# Altium PCB n-MAX.PcbDoc
Units mm, origin at the board's own origin, x right, y up, seen from the top; angles counter-clockwise.
Board outline 33.02 x 43.18 mm, 4 copper layers (Top Layer, 3.3V_PLANE, GND_PLANE, Bottom Layer); 26 components, 85 nets, 202 pads, 166 vias.
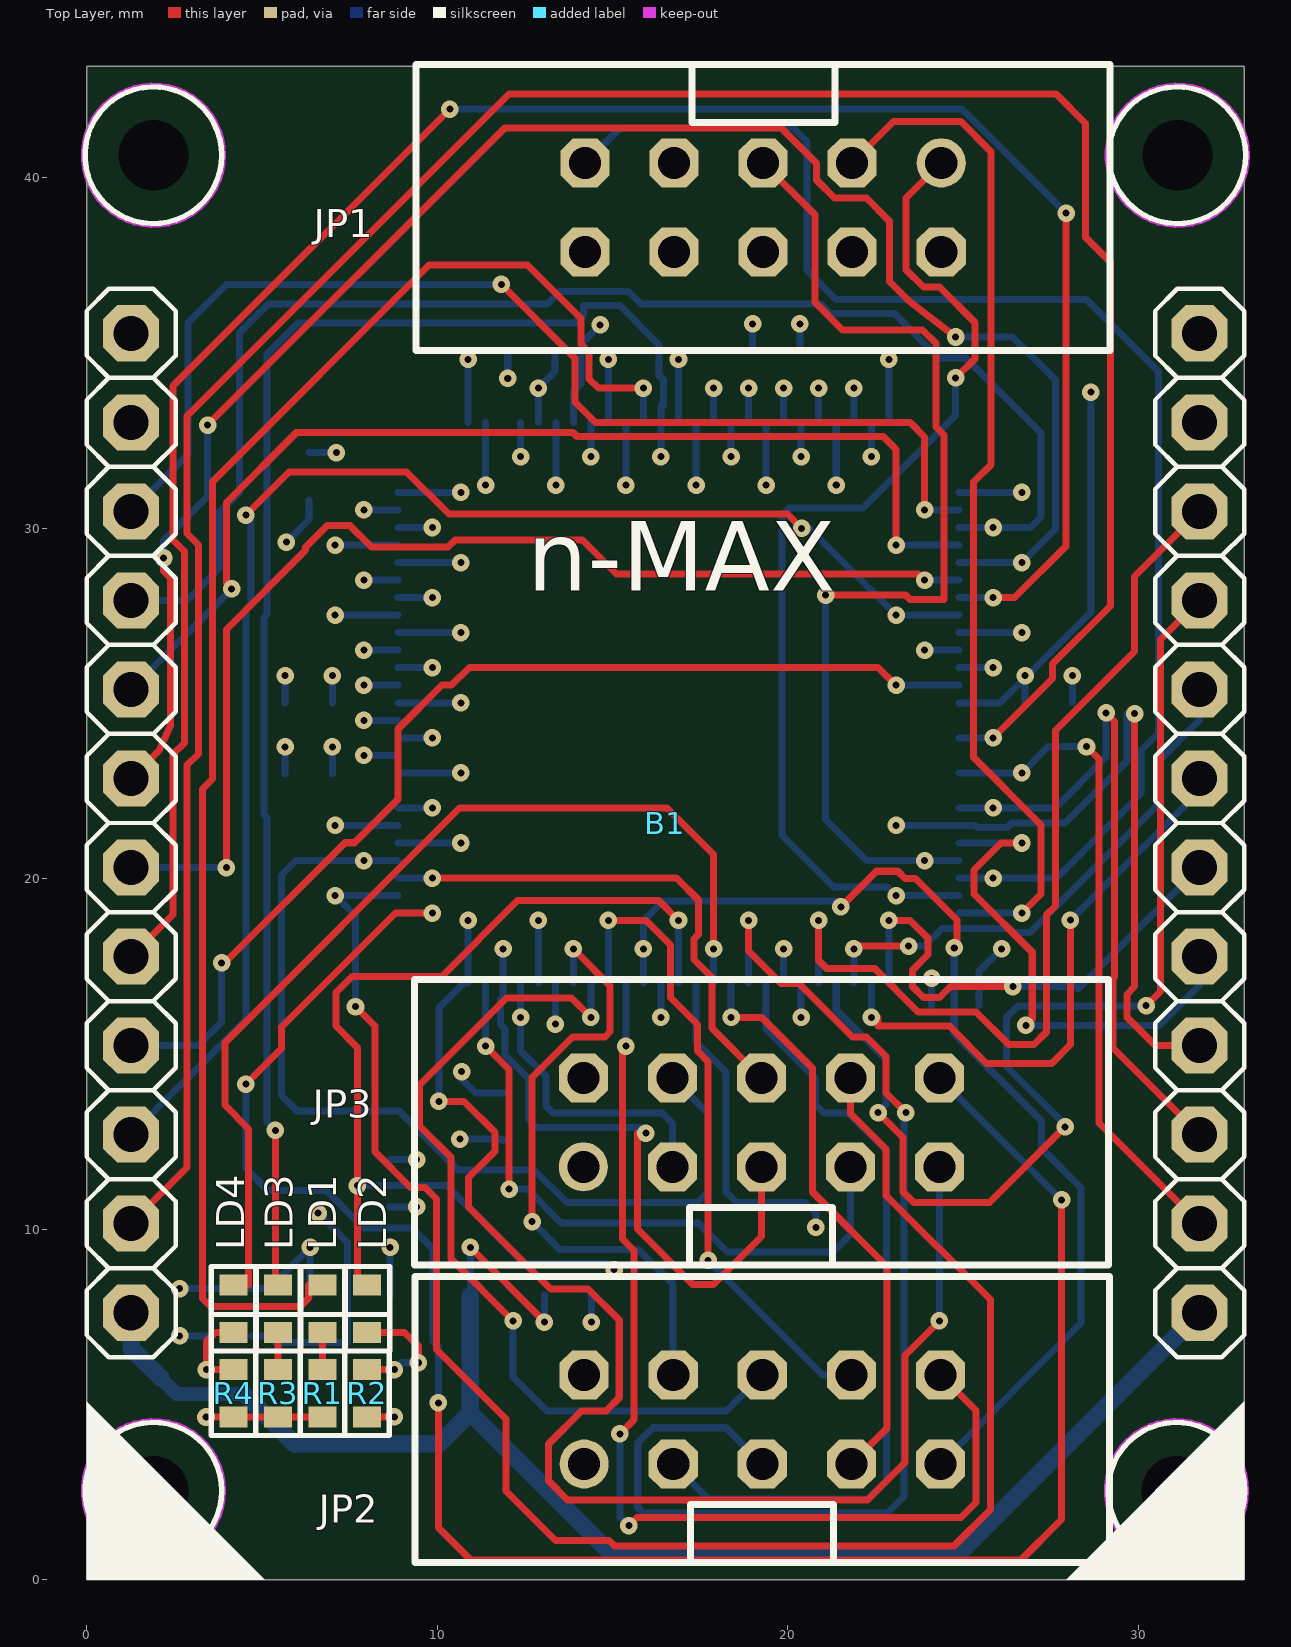
[diagram p0: Top Layer view]
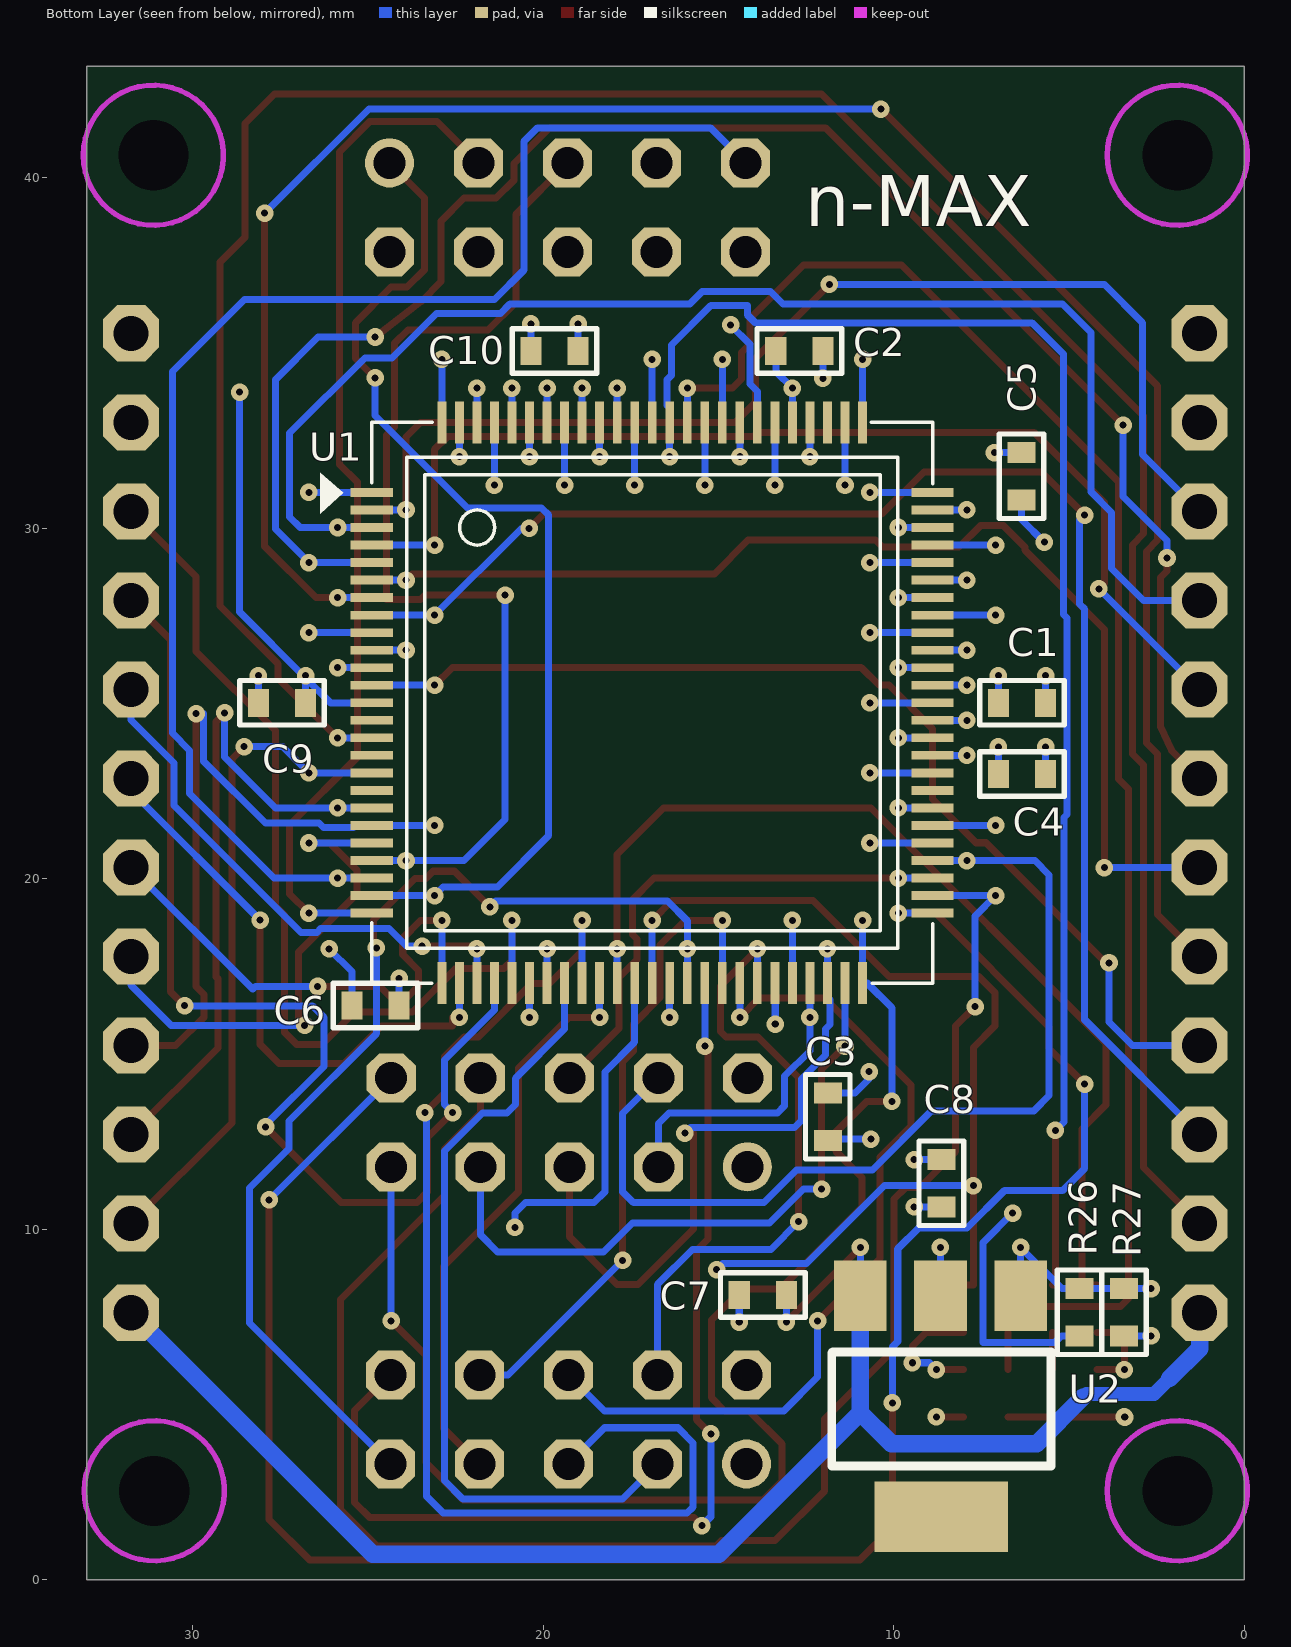
[diagram p1: Bottom Layer view, seen from below]
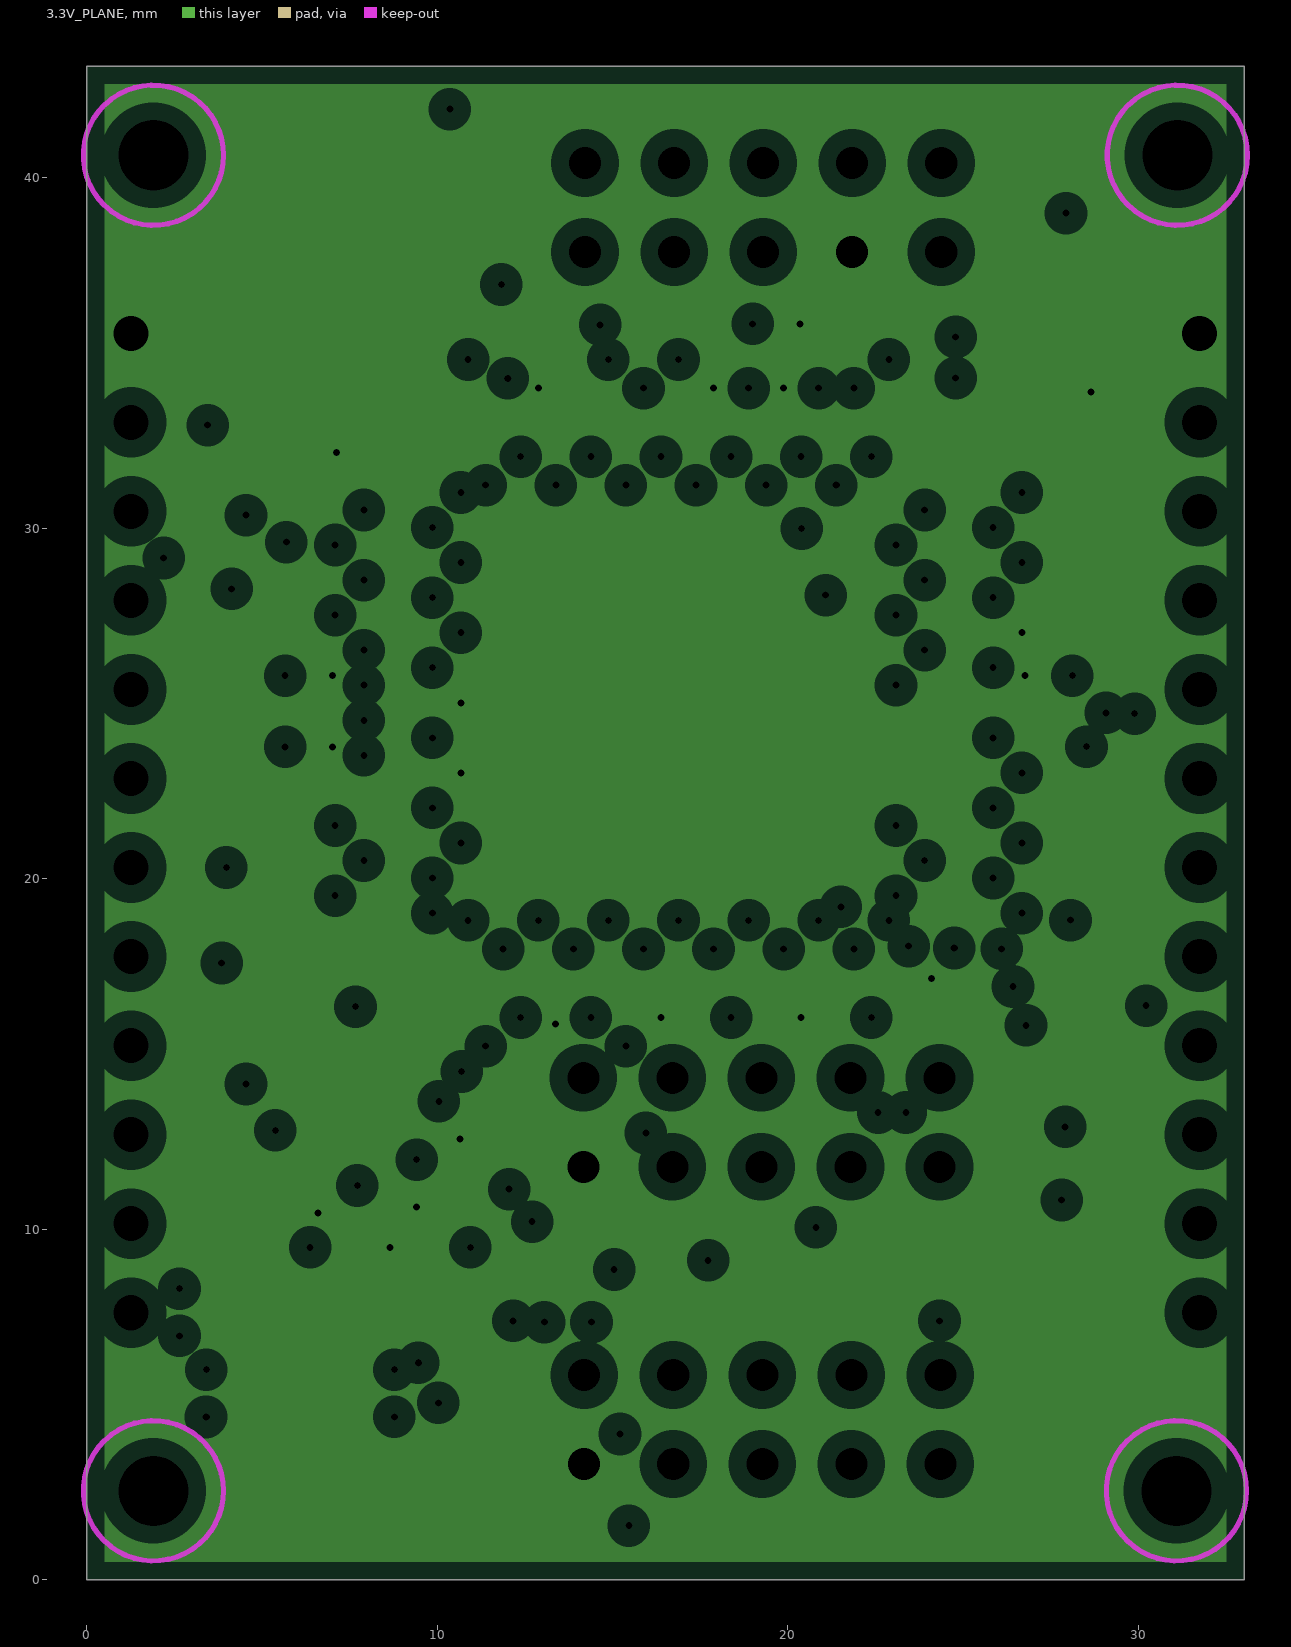
[diagram p2: 3.3V_PLANE, clearances drawn from the general rule]
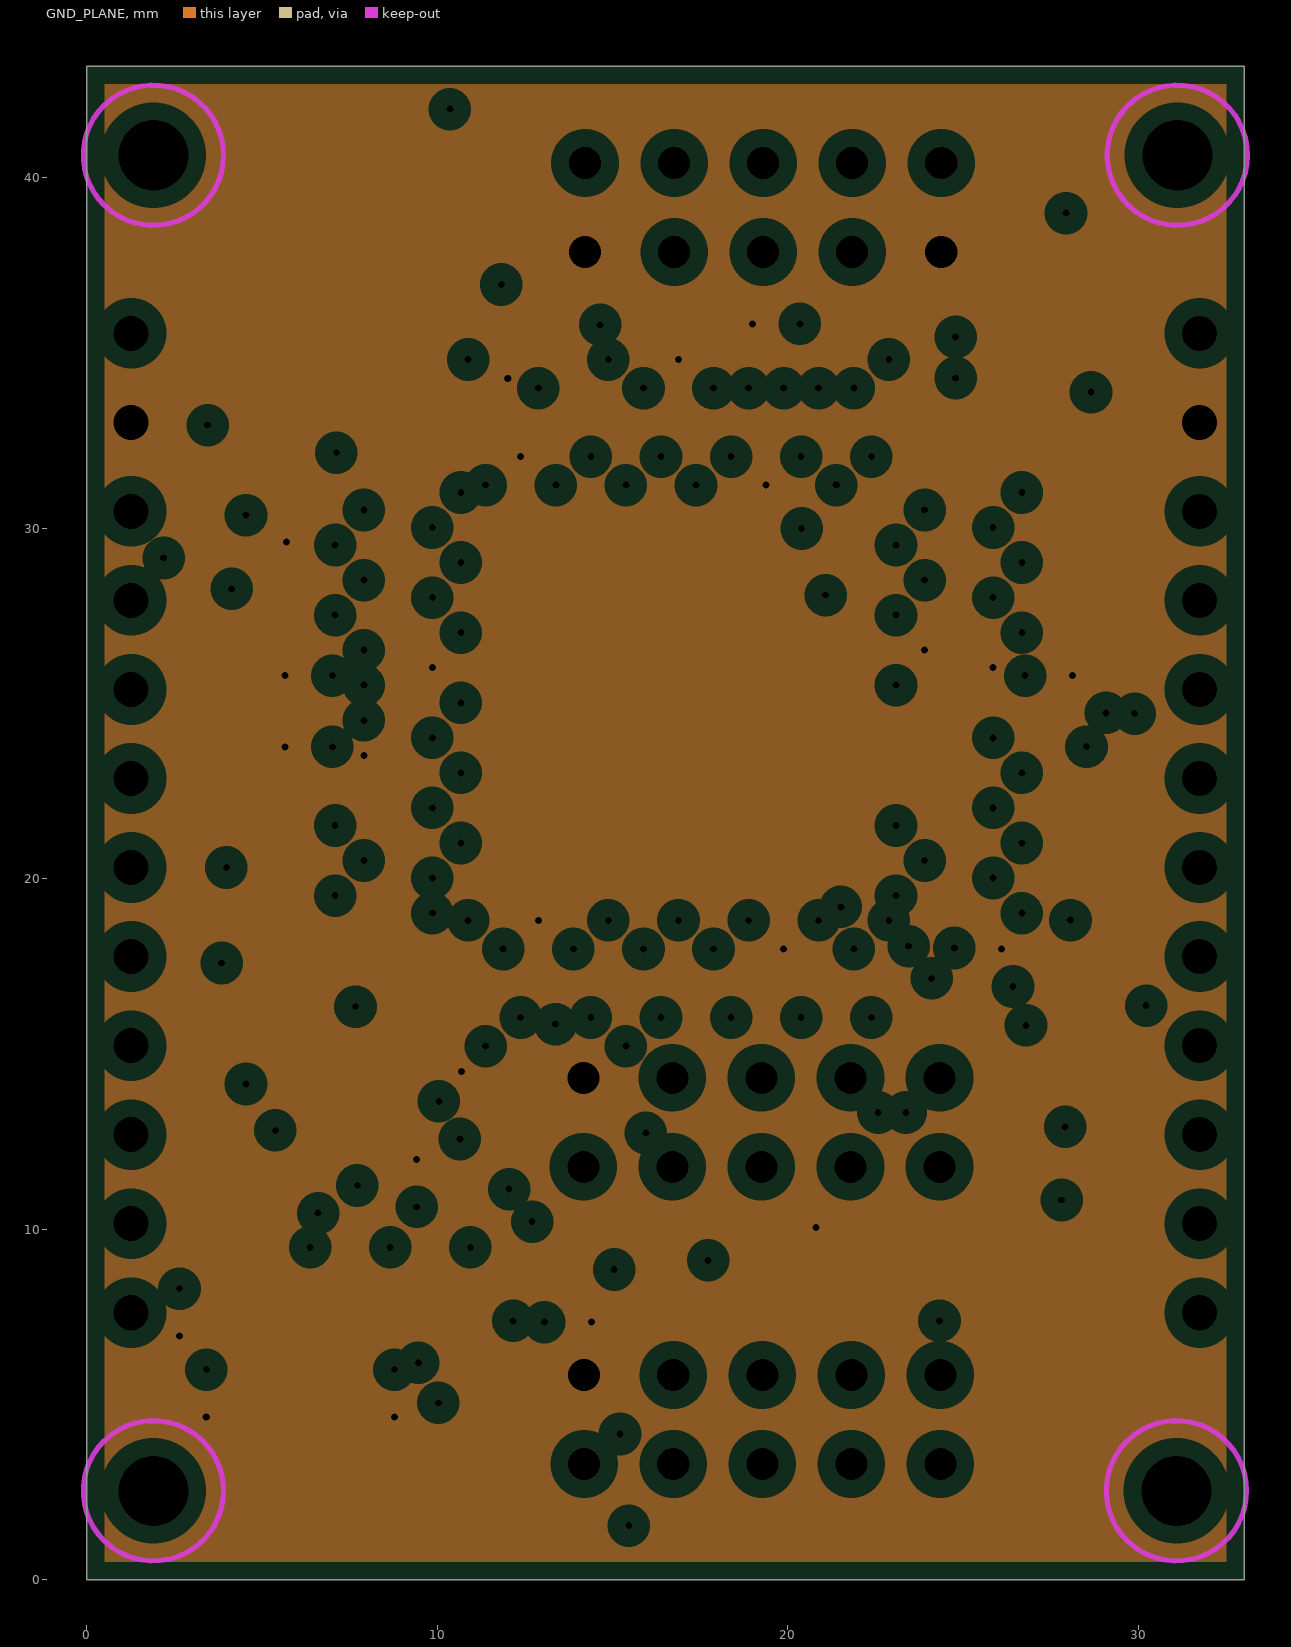
[diagram p3: GND_PLANE, clearances drawn from the general rule]

## Layer stack, top to bottom
Top Solder: solder mask 0.0102, Solder Resist, Dk 3.5
Top Layer: signal copper 0.0356
Dielectric1: core 0.32, FR-4, Dk 4.8
3.3V_PLANE: plane copper 0.036, net 3.3V
Dielectric2: prepreg 0.32, FR-4, Dk 4.8
GND_PLANE: plane copper 0.036, net GND
Dielectric3: core 0.32, FR-4, Dk 4.8
Bottom Layer: signal copper 0.0356
Bottom Solder: solder mask 0.0102, Solder Resist, Dk 3.5

## Board outline
0,0 33.02,0 33.02,43.18 0,43.18

## Design rules (kind name [scope] priority, off if disabled: settings)
Clearance [All] p1: gap=0.2 ignorepadtopadclearanceinfootprint=FALSE except(0: Arc-Hole Track-Hole SMDPad-Hole THPad-Hole Via-Hole Fill-Hole Poly-Hole Region-Hole Text-Hole)
ComponentClearance [All] p1 off: gap=0.254 collisioncheckmode=3 verticalgap=0.254 showdistances=FALSE
FabricationTestPointUsage TestPointUsage [All] p1: valid=0 allowmultiple=FALSE
FabricationTestpoint Testpoint [All] p1: side=3 testpointundercomponent=TRUE minsize=1.016 maxsize=2.54 preferedsize=1.524 minholesize=0 maxholesize=1.016 preferedholesize=0.813 testpointgrid=0.025 allowsidetop=TRUE allowsidebottom=TRUE usegrid=TRUE gridtolerance=0
HoleSize [All] p1: absolutevalues=TRUE maxlimit=8 minlimit=0 maxpercent=80.000 minpercent=20.000
PlaneClearance [All] p1: clearance=0.508
PlaneConnect [All] p1: planeconnectstyle=Relief reliefexpansion=0.508 reliefentries=4 reliefconductorwidth=0.254 reliefairgap=0.254
PolygonConnect [All] p1: connectstyle=Relief reliefconductorwidth=0.254 reliefentries=4 polygonreliefangle="90 Angle" airgapwidth=0.254
RoomDefinition n-MAX [InComponentClass('n-MAX')] p1: confinementstyle=ConfineIn formatcopy=TRUE lockcomponents=FALSE outline 34.163,-0.635 0,-0.635 0,-15.494 34.163,-15.494
RoutingVias [All] p1: holewidth=0.2 width=0.5 viastyle="Through Hole" minholewidth=0.2 minwidth=0.5 maxholewidth=2 maxwidth=2
SilkToSolderMaskClearance SilkscreenOverComponentPads [IsPad] p1: minsilkscreentomaskgap=0.254 clearancetoexposedcopper=TRUE
SolderMaskExpansion [All] p1: expansion=0.1
Width [All] p1: maxlimit=1 minlimit=0.2 preferedwidth=0.2
23 further rules are at their usual default settings.

## Components (designator, comment, footprint, x,y, rotation, side; value= is the part's Value field where it differs from the comment)
B1 "N-GMS-CONNECTORS" N-GMS 1.27,40.64 r270 top locked
C1 "100nF" 0603_CAP 6.35,25.019 r180 bottom
C2 "100nF" 0603_CAP 12.7,35.052 r180 bottom
C3 "100nF" 0603_CAP 11.875,13.2 r90 bottom
C4 "100nF" 0603_CAP 6.35,22.987 r180 bottom
C5 "100nF" 0603_CAP 6.35,31.496 r270 bottom
C6 "100nF" 0603_CAP 24.765,16.383 r0 bottom
C7 "10uF/MLCC" 0603_CAP 13.716,8.128 r0 bottom
C8 "10uF/MLCC" 0603_CAP 8.636,11.303 r90 bottom
C9 "100nF" 0603_CAP 27.432,25.019 r0 bottom
C10 "100nF" 0603_CAP 19.685,35.052 r180 bottom
JP1 "Header 5X2" ML10-FCI 19.3,39.15 r180 top
JP2 "Header 5X2" ML10-FCI 19.275,4.575 r0 top
JP3 "Header 5X2" ML10-FCI 19.25,13.05 r0 top
LD1 "LED" 0603_LED_RED 6.731,7.747 r270 top
LD2 "LED" 0603_LED_RED 8.001,7.747 r270 top
LD3 "LED" 0603_LED_RED 5.461,7.747 r270 top
LD4 "LED" 0603_LED_RED 4.191,7.747 r270 top
R1 "1K" 0603_res 6.731,5.334 r270 top
R2 "1K" 0603_res 8.001,5.334 r270 top
R3 "1K" 0603_res 5.461,5.334 r270 top
R4 "1K" 0603_res 4.191,5.334 r270 top
R26 "240R 1%" 0603_RES 4.699,7.62 r90 bottom
R27 "390R 1%" 0603_RES 3.429,7.62 r90 bottom
U1 "EPM240T100" TQFP100 24.88,33.02 r270 bottom
U2 "LM1117MPX-ADJ" SOT-223 8.636,4.953 r0 bottom

## Footprints (in the part's own frame and the unit in brackets; to place one, negate y for a bottom-side part, rotate by r counter-clockwise, add the part's x,y. Pads: shape width x height; smd on the part's side, far side on the other; paste and mask are expansions set on the pad)
0603_CAP [mm]
  rect 0.6x0.8 smd: 1(-0.66,0) 2(0.686,0)
  silkscreen extent -1.19,-0.63 1.22,0.64, body extent -0.8,-0.4 0.8,0.4, height 0.3
0603_LED_RED [mm]
  rect 0.6x0.8 smd: 1(-0.66,0) 2(0.686,0)
  silkscreen extent -1.19,-0.63 1.22,0.65, body extent -0.81,-0.4 0.81,0.4, height 0.6
0603_res [mm]
  rect 0.6x0.8 smd: 1(-0.66,0) 2(0.686,0)
  silkscreen extent -1.19,-0.63 1.22,0.64, body extent -0.8,-0.4 0.8,0.4, height 0.3
0603_RES [mm]
  rect 0.6x0.8 smd: 1(-0.66,0) 2(0.686,0)
  silkscreen extent -1.19,-0.63 1.22,0.64, body extent -0.8,-0.4 0.8,0.4, height 0.3
ML10-FCI [mm]
  round 1.4 hole 0.914: 1(-5.08,-1.27)
  oct 1.4x1.4 hole 0.914: 2(-5.08,1.27) 3(-2.54,-1.27) 4(-2.54,1.27) 5(0,-1.27) 6(0,1.27) 7(2.54,-1.27) 8(2.54,1.27) 9(5.08,-1.27) 10(5.08,1.27)
  silkscreen extent -9.9,-4.08 9.9,4.07, body extent -9.91,-4.06 9.91,4.06, height 9.44
N-GMS [mil]
  round 39.37 hole 78.74 paste+0: 0(0,1175) 0(0,25) 0(1500,1174) 0(1500,25)
  oct 63x63 hole 39.37: 1(200,0) 2(300,0) 3(400,0) 4(500,0) 5(600,0) 6(700,0) 7(800,0) 8(900,0) 9(1000,0) 10(1100,0) 11(1200,0) 12(1300,0) 13(1300,1200) 14(1200,1200) 15(1100,1200) 16(1000,1200) 17(900,1200) 18(800,1200) 19(700,1200) 20(600,1200) 21(500,1200) 22(400,1200) 23(300,1200) 24(200,1200)
  Keep-Out Layer circle w5.91: c1500,1174 r78.74
  Keep-Out Layer circle w5.91: c0,1175 r78.74
  Keep-Out Layer circle w5.91: c0,25 r78.74
  Keep-Out Layer circle w5.91: c1500,25 r78.74
  silkscreen extent -77,-52 1600,1252, body extent -75,-51 1577,1251, height 335
SOT-223 [mil]
  rect 59x79 smd: 1(-89,-124) 2(1,-124) 3(91,-124)
  rect 150x79 smd: 4(0,124)
  silkscreen extent -123,-61 123,67
TQFP100 [mm]
  rect 0.25x1.2 smd: 1(2,-0.005) 2(2.5,-0.005) 3(3,-0.005) 4(3.5,-0.005) 5(4,-0.005) 6(4.5,-0.005) 7(5,-0.005) 8(5.5,-0.005) 9(6,-0.005) 10(6.5,-0.005) 11(7,-0.005) 12(7.5,-0.005) 13(8,-0.005) 14(8.5,-0.005) 15(9,-0.005) 16(9.5,-0.005) 17(10,-0.005) 18(10.5,-0.005) 19(11,-0.005) 20(11.5,-0.005) 21(12,-0.005) 22(12.5,-0.005) 23(13,-0.005) 24(13.5,-0.005) 25(14,-0.005) 51(14,15.995) 52(13.5,15.995) 53(13,15.995) 54(12.5,15.995) 55(12,15.995) 56(11.5,15.995) 57(11,15.995) 58(10.5,15.995) 59(10,15.995) 60(9.5,15.995) 61(9,15.995) 62(8.5,15.995) 63(8,15.995) 64(7.5,15.995) 65(7,15.995) 66(6.5,15.995) 67(6,15.995) 68(5.5,15.995) 69(5,15.995) 70(4.5,15.995) 71(4,15.995) 72(3.5,15.995) 73(3,15.995) 74(2.5,15.995) 75(2,15.995)
  rect 1.2x0.25 smd: 26(16,1.995) 27(16,2.495) 28(16,2.995) 29(16,3.495) 30(16,3.995) 31(16,4.495) 32(16,4.995) 33(16,5.495) 34(16,5.995) 35(16,6.495) 36(16,6.995) 37(16,7.495) 38(16,7.995) 39(16,8.495) 40(16,8.995) 41(16,9.495) 42(16,9.995) 43(16,10.495) 44(16,10.995) 45(16,11.495) 46(16,11.995) 47(16,12.495) 48(16,12.995) 49(16,13.495) 50(16,13.995) 76(0,13.995) 77(0,13.495) 78(0,12.995) 79(0,12.495) 80(0,11.995) 81(0,11.495) 82(0,10.995) 83(0,10.495) 84(0,9.995) 85(0,9.495) 86(0,8.995) 87(0,8.495) 88(0,7.995) 89(0,7.495) 90(0,6.995) 91(0,6.495) 92(0,5.995) 93(0,5.495) 94(0,4.995) 95(0,4.495) 96(0,3.995) 97(0,3.495) 98(0,2.995) 99(0,2.495) 100(0,1.995)
  silkscreen extent 0,0 16,16, body extent 0.45,0.45 15.46,15.46, height 1.74

## Part data
C1 C2 C3 C4 C5 C6 C7 C8 C9 C10: library part C, "CAPACITOR"
JP1 JP2 JP3: "Header, 5-Pin, Dual row"
R1 R2 R3 R4 R26 R27: library part R, "RESISTOR"
U2: library part LM1117, "REGULATOR LOW DROPOUT"

## Via types
v1: diameter 0.5, hole 0.2, Top Layer to Bottom Layer, tented both sides, 164 vias
v2: diameter 0.5, hole 0.2, Top Layer to Bottom Layer, 2 vias

## Nets (pads, with @x,y where several pads share a name; then routed paths per layer and width w, separated by ;. In a path a pad name is that pad's centre, name@x,y a point inside that pad or via, vN(x,y) a via of type N, cw(c..) or ccw(c..) an arc to the next point about the centre after c; other vN are vias at no path point)
1: B1.3 U1.2 | length 33.1
  Top Layer w0.2: v1(11.831,36.952) 13.935,34.848 13.935,33.601 14.521,33.015 23.495,33.015 23.908,32.602 v1(23.908,30.52)
  Bottom Layer w0.2: B1.3 2.896,32.106 2.896,35.86 3.988,36.952 v1(11.831,36.952) ; v1(23.908,30.52) U1.2
2: B1.4 U1.3 | length 39.7
  Bottom Layer w0.2: B1.4 2.865,27.94 3.778,28.853 3.778,30.447 4.369,31.039 4.369,35.581 5.182,36.394 13.151,36.394 13.506,36.748 15.458,36.748 15.813,36.394 20.948,36.394 21.217,36.125 23.041,36.125 24.307,34.859 25.08,34.859 27.229,32.711 27.229,30.323 26.926,30.02 v1(25.862,30.02) U1.3
3: B1.5 U1.4 | length 31.2
  Top Layer w0.2: v1(4.14,28.27) 3.988,28.423 3.988,30.729 5.994,32.736 13.868,32.736 13.995,32.609 22.733,32.609 23.091,32.251 v1(23.091,29.52)
  Bottom Layer w0.2: B1.5 v1(4.14,28.27) ; v1(23.091,29.52) U1.4
3.3V: B1.1 B1.24 C1.1 C2.1 C3.1 C4.1 C5.1 C6.1 C8.1 C9.1 C10.1 JP1.4 JP2.1 JP3.1 R26.1 U1.9 U1.13 U1.31 U1.39 U1.45 U1.59 U1.63 U1.80 U1.90 U1.94 U2.2 | length 38.7
  Bottom Layer w0.2: R26.1 5.207,6.96 5.389,6.777 7.442,6.777 7.442,9.622 v1(6.604,10.46) ; C5.1 v1(7.127,32.156) ; C4.1 v1(7.01,23.764) ; C1.1 v1(7.01,25.796) ; C8.1 v1(9.413,10.643) ; U2.2 v1(8.661,9.483) ; U1.59 v1(10.679,23.02) ; U1.63 v1(10.679,25.02) ; v1(10.65,12.575) 11.84,12.575 C3.1 ; U1.80 v1(12.885,33.997) 13.36,34.472 C2.1 ; v1(13.375,15.85) 13.375,17.01 U1.45 ; v1(16.385,16.043) U1.39 ; U1.90 v1(17.885,33.997) ; U1.94 v1(19.885,33.997) ; C10.1 v1(20.345,35.829) ; v1(20.385,16.043) U1.31 ; C6.1 v1(24.105,17.16) ; U1.13 26.06,25.02 v1@26.772,25.731 ; U1.9 v1(26.679,27.02) ; C9.1 v1@26.772,25.731 ; v1(26.772,25.796) v1@26.772,25.731 ; v1(28.651,33.879) 28.651,27.611 v1@26.772,25.731
4: B1.6 U1.5 | length 50.4
  Top Layer w0.2: B1.6 2.07,23.66 2.388,24.359 2.388,28.596 2.2,28.784 v1(2.2,29.15) ; v1(3.454,32.939) 11.938,41.423 19.812,41.423 20.828,40.407 20.828,39.924 21.336,39.416 22.25,39.416 22.909,38.757 22.909,37.033 23.47,36.472 v1(24.79,35.454)
  Bottom Layer w0.2: v1(2.2,29.15) 2.2,29.653 3.454,30.907 v1(3.454,32.939) ; v1(24.79,35.454) 26.416,35.454 27.635,34.235 27.635,29.976 v1(26.679,29.02) U1.5
5: B1.7 U1.6 | length 32.5
  Top Layer w0.2: v1(3.988,20.32) 3.988,27.11 6.25,29.372 6.25,29.457 6.863,30.07 7.517,30.07 8.128,29.459 10.312,29.459 10.516,29.663 14.148,29.663 15.113,28.697 23.731,28.697 v1(23.908,28.52)
  Bottom Layer w0.2: B1.7 v1(3.988,20.32) ; v1(23.908,28.52) U1.6
5V: B1.12 B1.13 C7.1 U2.3 | length 45.9
  Top Layer w0.2: v1(10.947,9.483) 13.056,7.375 v1(13.056,7.351)
  Bottom Layer w0.2: U2.3 v1(10.947,9.483) ; v1(13.056,7.351) C7.1
  Bottom Layer w0.4: 2.125,5.745 2.571,5.298 4.502,5.298
  Bottom Layer w0.5: B1.12 1.27,6.599 2.125,5.745 ; 4.597,5.202 5.918,3.882 10.058,3.882 10.947,4.771 ; U2.3 10.947,4.771 ; B1.13 24.862,0.732 14.986,0.732 10.947,4.771
6: B1.8 U1.7 | length 60.2
  Top Layer w0.2: B1.8 2.47,18.98 2.47,23.554 2.788,23.871 2.788,29.34 2.47,29.658 2.47,34.063 v1(10.363,41.956) ; v1(25.862,28.02) 26.475,28.02 27.94,29.485 v1(27.94,38.984)
  Bottom Layer w0.2: v1(10.363,41.956) 24.968,41.956 v1(27.94,38.984) ; U1.7 v1(25.862,28.02)
7: B1.9 U1.12 | length 30.5
  Top Layer w0.2: v1(3.854,17.598) 3.937,17.598 7.366,21.027 7.645,21.027 8.89,22.271 8.89,24.278 10.135,25.522 10.414,25.522 10.922,26.03 22.581,26.03 v1(23.091,25.52)
  Bottom Layer w0.2: B1.9 3.18,15.24 3.854,15.915 v1(3.854,17.598) ; v1(23.091,25.52) U1.12
8: B1.10 U1.8 | length 41.7
  Top Layer w0.2: v1(4.547,30.374) 5.779,31.606 9.131,31.606 10.338,30.399 19.99,30.399 v1(20.396,29.993)
  Bottom Layer w0.2: B1.10 4.547,15.977 4.547,27.698 4.69,27.841 4.69,30.23 v1(4.547,30.374) ; v1(20.396,29.993) 20.619,29.993 v1(23.091,27.52) U1.8
9: B1.11 U1.15 | length 73.9
  Top Layer w0.2: B1.11 2.87,11.76 2.87,23.241 3.188,23.559 3.188,29.526 2.87,29.844 2.87,33.203 12.055,42.388 27.661,42.388 28.499,41.55 28.499,38.299 29.21,37.587 29.21,27.783 27.559,26.132 27.559,25.717 v1(25.862,24.02)
  Bottom Layer w0.2: U1.15 v1(25.862,24.02)
10: B1.14 U1.17 | length 18.9
  Top Layer w0.2: v1(28.524,23.77) 28.876,23.418 28.876,13.034 B1.14
  Bottom Layer w0.2: U1.17 v1(26.679,23.02) 27.429,23.77 v1(28.524,23.77)
11: B1.15 U1.19 | length 19.2
  Top Layer w0.2: v1(29.081,24.731) 29.322,24.489 29.322,17.201 29.276,17.156 29.276,15.174 B1.15
  Bottom Layer w0.2: U1.19 v1(25.862,22.02) 27.632,22.02 29.081,23.468 v1(29.081,24.731)
12: B1.16 U1.20 | length 20.1
  Top Layer w0.2: v1(29.896,24.71) 29.896,16.921 29.676,16.701 29.676,16.048 30.484,15.24 B1.16
  Bottom Layer w0.2: v1(23.091,21.52) U1.20 25.349,21.52 25.411,21.458 26.264,21.458 26.391,21.585 27.915,21.585 29.681,23.351 29.681,24.71 v1(29.896,24.71)
13: B1.17 U1.21 | length 14.9
  Top Layer w0.2: v1(26.679,21.02) 26.084,21.02 25.312,20.248 25.312,19.568 26.976,17.904 26.976,15.999 v1(26.797,15.82)
  Bottom Layer w0.2: U1.21 v1(26.679,21.02) ; v1(26.797,15.82) 30.607,15.82 31.75,16.963 B1.17
14: B1.18 U1.26 | length 14.6
  Top Layer w0.2: v1(22.885,18.814) 23.491,18.814 24.001,18.304 24.001,17.834 23.555,17.388 23.555,16.932 23.877,16.61 24.332,16.61 24.648,16.926 v1(26.426,16.926)
  Bottom Layer w0.2: U1.26 v1(22.885,18.814) ; v1(26.426,16.926) 28.204,16.926 28.28,16.85 B1.18
15: B1.19 U1.27 | length 16.7
  Top Layer w0.2: v1(22.385,16.043) 22.581,16.043 22.581,15.794 24.612,15.794 25.673,14.734 27.534,14.734 28.067,15.267 v1(28.067,18.817)
  Bottom Layer w0.2: v1(22.385,16.043) U1.27 ; v1(28.067,18.817) 31.75,22.5 B1.19
16: B1.20 U1.28 | length 15.2
  Top Layer w0.2: v1(21.885,17.997) 21.964,18.076 v1(23.451,18.076)
  Bottom Layer w0.2: U1.28 v1(21.885,17.997) ; v1(23.451,18.076) 23.898,18.076 24.398,18.576 26.345,18.576 26.451,18.47 26.907,18.47 30.531,22.094 30.531,23.303 31.75,24.523 B1.20
17: B1.21 U1.29 | length 32.7
  Top Layer w0.2: v1(22.581,13.33) 23.292,12.619 23.292,11.07 23.597,10.765 25.756,10.765 v1(27.915,12.924) ; v1(30.226,16.378) 30.632,16.785 30.632,26.822 B1.21
  Bottom Layer w0.2: U1.29 21.385,16.253 22.809,14.829 22.809,13.559 v1(22.581,13.33) ; v1(27.915,12.924) 27.915,12.982 26.247,14.649 26.247,16.048 26.569,16.37 30.217,16.37 v1(30.226,16.378)
18: B1.22 U1.30 | length 27.2
  Top Layer w0.2: v1(20.885,18.814) 20.885,17.668 21.107,17.445 22.476,17.445 23.72,16.201 25.375,16.201 26.306,15.27 27.025,15.27 27.376,15.621 27.376,18.964 27.635,19.223 27.635,24.227 29.896,26.488 29.896,28.626 B1.22
  Bottom Layer w0.2: U1.30 v1(20.885,18.814)
19: JP2.3 U1.33 | length 22.7
  Bottom Layer w0.2: JP2.3 17.735,2.305 22.289,2.305 22.815,2.831 22.815,12.229 21.724,13.32 21.031,13.32 20.79,13.561 20.79,14.308 19.385,15.713 U1.33
20: JP2.5 U1.34 | length 34.5
  Top Layer w0.2: v1(18.885,18.814) 18.885,17.94 19.812,17.013 20.32,17.013 21.844,15.489 22.25,15.489 22.809,14.931 22.809,13.889 v1(23.368,13.33)
  Bottom Layer w0.2: U1.34 v1(18.885,18.814) ; JP2.5 18.241,4.339 16.154,4.339 15.723,3.907 15.723,2.072 15.89,1.905 22.847,1.905 23.317,2.375 23.317,13.28 v1(23.368,13.33)
21: JP2.7 U1.35 | length 16.5
  Top Layer w0.2: v1(18.385,16.043) 19.258,16.043 20.701,14.6 20.701,11.07 22.835,8.936 22.835,4.325 JP2.7
  Bottom Layer w0.2: v1(18.385,16.043) U1.35
22: JP2.9 U1.40 | length 30.7
  Top Layer w0.2: v1(21.514,19.198) 22.53,20.214 23.139,20.214 23.343,20.011 23.647,20.011 24.835,18.823 24.835,18.15 24.751,18.066 v1(24.751,18.026)
  Bottom Layer w0.2: U1.40 v1(15.885,17.997) 15.885,18.801 16.447,19.364 21.348,19.364 v1(21.514,19.198) ; JP2.9 28.372,7.322 28.372,11.181 27.247,12.306 27.247,13.084 24.751,15.579 v1(24.751,18.026)
23: JP2.10 U1.41 | length 30.2
  Top Layer w0.2: v1(15.215,4.161) 15.621,4.567 15.621,9.393 15.291,9.724 15.291,15.132 v1(15.385,15.226) ; v1(15.469,1.545) 15.697,1.773 24.943,1.773 25.375,2.205 25.375,4.825 JP2.10
  Bottom Layer w0.2: v1(15.215,4.161) 15.215,1.799 v1(15.469,1.545) ; v1(15.385,15.226) U1.41
24: JP2.8 U1.42 | length 18.7
  Top Layer w0.2: v1(14.885,18.814) 15.955,18.814 16.662,18.106 16.662,16.607 17.424,15.845 17.424,15.083 17.729,14.778 v1(17.729,9.114)
  Bottom Layer w0.2: U1.42 v1(14.885,18.814) ; v1(17.729,9.114) 20.998,5.845 JP2.8
25: JP2.6 U1.43 | length 24.5
  Top Layer w0.2: v1(12.167,7.387) 10.389,9.165 10.389,12.059 9.5,12.947 9.5,14.119 11.974,16.593 13.835,16.593 v1(14.385,16.043)
  Bottom Layer w0.2: v1(12.167,7.387) 12.167,5.787 13.132,4.821 18.251,4.821 JP2.6 ; v1(14.385,16.043) U1.43
26: JP2.4 U1.44 | length 18
  Top Layer w0.2: v1(12.708,10.218) 12.708,14.332 13.865,15.489 14.783,15.489 14.935,15.642 14.935,16.947 v1(13.885,17.997)
  Bottom Layer w0.2: v1(12.708,10.218) 13.497,9.429 15.738,9.429 16.735,8.432 JP2.4 ; U1.44 v1(13.885,17.997)
27: JP3.3 U1.47 | length 8.8
  Bottom Layer w0.2: U1.47 v1(12.385,16.043) 12.385,15.091 13.106,14.37 13.106,13.523 13.31,13.32 16.41,13.32 16.71,13.02 JP3.3
28: JP3.5 U1.48 | length 18.5
  Top Layer w0.2: v1(15.951,12.746) 15.71,12.746 15.71,10.009 17.291,8.428 17.886,8.428 19.25,9.792 JP3.5
  Bottom Layer w0.2: v1(11.885,17.997) U1.48 11.885,16.556 11.811,16.556 11.811,15.845 11.938,15.718 11.938,14.972 12.625,14.286 12.625,13.102 12.828,12.899 15.799,12.899 v1(15.951,12.746)
29: JP3.7 U1.49 | length 18.8
  Top Layer w0.2: v1(11.385,15.226) 12.054,14.557 v1(12.054,11.146)
  Bottom Layer w0.2: v1(11.385,15.226) U1.49 ; v1(12.054,11.146) 12.573,11.146 13.538,10.181 17.45,10.181 18.278,9.353 21.295,9.353 21.79,9.847 JP3.7
30: JP3.9 U1.50 | length 41.1
  Top Layer w0.2: v1(10.05,13.65) 10.765,13.65 11.648,12.767 11.648,12.228 10.897,11.476 10.897,10.638 13.233,8.301 14.306,8.301 15.195,7.412 15.195,5.195 14.821,4.821 14.122,4.821 13.183,3.882 13.183,2.815 13.716,2.281 22.276,2.281 23.343,3.348 23.343,6.399 v1(24.33,7.387)
  Bottom Layer w0.2: v1(10.05,13.65) 10.05,16.319 10.751,17.02 U1.50 v1(10.885,18.814) ; v1(24.33,7.387) JP3.9
31: JP3.10 U1.51 | length 58.1
  Top Layer w0.2: v1(4.547,14.143) 5.563,15.159 5.563,15.776 8.807,19.02 v1(9.862,19.02) ; v1(10.033,5.05) 10.033,1.494 10.955,0.572 26.663,0.572 27.813,1.723 v1(27.813,10.837)
  Bottom Layer w0.2: v1(4.547,14.143) 4.547,11.735 5.182,11.1 6.842,11.1 7.899,10.043 9.282,10.043 9.881,9.444 9.881,6.803 10.033,6.65 v1(10.033,5.05) ; U1.51 v1(9.862,19.02) ; JP3.10 v1(27.813,10.837)
32: JP3.8 U1.52 | length 49.9
  Top Layer w0.2: v1(7.671,16.353) 8.23,15.794 8.23,12.213 9.246,11.197 9.652,11.197 9.982,10.867 9.982,6.574 11.963,4.593 11.963,2.535 13.376,1.122 14.906,1.122 15.056,0.972 24.751,0.972 25.781,2.002 25.781,7.996 22.809,10.968 22.809,12.286 21.79,13.305 JP3.8
  Bottom Layer w0.2: v1(7.671,16.353) 7.671,18.94 v1(7.091,19.52) U1.52
33: JP3.6 U1.53 | length 14.8
  Top Layer w0.2: v1(9.862,20.02) 16.831,20.02 17.45,19.401 17.45,18.41 17.323,18.283 17.323,17.699 17.835,17.187 17.835,15.735 JP3.6
  Bottom Layer w0.2: U1.53 v1(9.862,20.02)
34: JP3.4 U1.54 | length 27
  Bottom Layer w0.2: U1.54 v1(7.908,20.52) 5.97,20.52 5.563,20.112 5.563,13.813 5.994,13.381 8.915,13.381 10.601,11.696 12.768,11.696 13.7,10.765 17.424,10.765 17.729,11.07 17.729,13.301 JP3.4
35: U1.55 | length 1.8
  Bottom Layer w0.2: U1.55 v1(10.679,21.02)
36: U1.56 | length 1.8
  Bottom Layer w0.2: v1(7.091,21.52) U1.56
37: U1.57 | length 1
  Bottom Layer w0.2: U1.57 v1(9.862,22.02)
38: 
39: U1.61 | length 1
  Bottom Layer w0.2: U1.61 v1(9.862,24.02)
40: U1.62 | length 1
  Bottom Layer w0.2: v1(7.908,24.52) U1.62
41: U1.64 | length 1
  Bottom Layer w0.2: v1(7.908,25.52) U1.64
42: U1.66 | length 1
  Bottom Layer w0.2: v1(7.908,26.52) U1.66
43: U1.67 | length 1.8
  Bottom Layer w0.2: U1.67 v1(10.679,27.02)
44: U1.68 | length 1.8
  Bottom Layer w0.2: v1(7.091,27.52) U1.68
45: U1.69 | length 1
  Bottom Layer w0.2: U1.69 v1(9.862,28.02)
46: U1.70 | length 1
  Bottom Layer w0.2: v1(7.908,28.52) U1.70
47: U1.71 | length 1.8
  Bottom Layer w0.2: U1.71 v1(10.679,29.02)
48: U1.72 | length 1.8
  Bottom Layer w0.2: v1(7.091,29.52) U1.72
49: U1.73 | length 1
  Bottom Layer w0.2: U1.73 v1(9.862,30.02)
50: U1.74 | length 1
  Bottom Layer w0.2: v1(7.908,30.52) U1.74
51: U1.75 | length 1.8
  Bottom Layer w0.2: U1.75 v1(10.679,31.02)
52: U1.76 | length 1.8
  Bottom Layer w0.2: U1.76 v1(10.885,34.814)
53: U1.77 | length 1.8
  Bottom Layer w0.2: v1(11.385,31.226) U1.77
54: U1.78
55: U1.81 | length 1.8
  Bottom Layer w0.2: v1(13.385,31.226) U1.81
56: U1.82 | length 3.1
  Bottom Layer w0.2: U1.82 13.885,33.903 14.1,34.118 14.1,35.248 v1(14.65,35.798)
57: U1.83 | length 1
  Bottom Layer w0.2: v1(14.385,32.043) U1.83
58: U1.84 | length 1.8
  Bottom Layer w0.2: U1.84 v1(14.885,34.814)
59: U1.85 | length 1.8
  Bottom Layer w0.2: v1(15.385,31.226) U1.85
60: U1.89 | length 1.8
  Bottom Layer w0.2: v1(17.385,31.226) U1.89
61: U1.91 | length 1
  Bottom Layer w0.2: v1(18.385,32.043) U1.91
62: U1.92 | length 1
  Bottom Layer w0.2: U1.92 v1(18.885,33.997)
63: U1.95 | length 1
  Bottom Layer w0.2: v1(20.385,32.043) U1.95
64: U1.96 | length 1
  Bottom Layer w0.2: U1.96 v1(20.885,33.997)
65: U1.97 | length 1.8
  Bottom Layer w0.2: v1(21.385,31.226) U1.97
66: U1.98 | length 1
  Bottom Layer w0.2: U1.98 v1(21.885,33.997)
67: U1.99 | length 1
  Bottom Layer w0.2: v1(22.385,32.043) U1.99
68: U1.100 | length 1.8
  Bottom Layer w0.2: U1.100 v1(22.885,34.814)
69: U1.1 | length 1.8
  Bottom Layer w0.2: U1.1 v1(26.679,31.02)
CLK: JP1.1 U1.24 | length 30
  Top Layer w0.2: JP1.1 23.38,39.42 23.38,37.372 23.876,36.876 24.333,36.876 25.349,35.86 25.349,34.844 v1(24.79,34.285)
  Bottom Layer w0.2: v1(24.79,34.285) 24.79,33.219 22.149,30.577 20.041,30.577 19.837,30.374 19.837,21.23 21.304,19.764 22.848,19.764 v1(23.091,19.52) U1.24
GND: B1.2 B1.23 C1.2 C2.2 C3.2 C4.2 C5.2 C6.2 C7.2 C8.2 C9.2 C10.2 JP1.2 JP1.10 JP2.2 JP3.2 R1.2 R2.2 R3.2 R4.2 R27.1 U1.10 U1.11 U1.32 U1.37 U1.46 U1.60 U1.65 U1.79 U1.88 U1.93 | length 36
  Top Layer w0.2: v1(3.404,4.644) 3.408,4.648 v1(3.414,4.648) R4.2 R3.2 R1.2 ; R2.2 v1(8.778,4.648)
  Bottom Layer w0.2: v1(2.652,6.96) R27.1 ; C4.2 v1(5.664,23.764) ; C1.2 v1(5.664,25.796) ; v2(5.7,29.6) 6.35,30.25 C5.2 ; v1(7.908,23.52) U1.60 ; C8.2 v1(9.413,11.989) ; U1.65 v1(9.862,26.02) ; v2(10.7,14.5) 10.7,14.284 11.098,13.886 C3.2 ; v1(12.014,34.275) C2.2 ; v1(12.385,32.043) U1.79 ; U1.46 v1(12.885,18.814) ; v1(14.402,7.351) C7.2 ; U1.88 v1(16.885,34.814) ; U1.37 17.385,15.337 18.237,14.485 18.237,11.07 18.542,10.765 20.498,10.765 20.803,10.46 v1(20.803,10.054) ; C10.2 v1(18.999,35.829) ; v1(19.385,31.226) U1.93 ; U1.32 v1(19.885,17.997) ; v1(23.908,26.52) U1.10 ; U1.11 v1(25.862,26.02) ; C6.2 25.451,17.35 v1(26.101,18.001) ; C9.2 v1(28.118,25.796)
LED0: LD1.1 U1.86 | length 45.6
  Top Layer w0.2: LD1.1 6.325,8.407 6.325,8.022 6.096,7.793 3.531,7.793 3.302,8.022 3.302,22.556 3.588,22.841 3.588,31.326 9.773,37.511 12.573,37.511 14.1,35.984 14.1,35.251 14.335,35.016 14.335,34.26 14.598,33.997 v1(15.885,33.997)
  Bottom Layer w0.2: U1.86 v1(15.885,33.997)
LED1: LD2.1 U1.38 | length 30.1
  Top Layer w0.2: LD2.1 7.722,8.407 v1(7.722,11.248) 7.722,15.185 7.112,15.794 7.112,16.759 7.569,17.217 10.135,17.217 12.294,19.376 16.323,19.376 v1(16.885,18.814)
  Bottom Layer w0.2: v1(7.722,11.248) 10.262,11.248 12.48,9.029 14.873,9.029 v1(15.05,8.852) ; U1.38 v1(16.885,18.814)
LED2: LD3.1 U1.87 | length 42.5
  Top Layer w0.2: v1(5.385,12.822) 5.385,8.407 LD3.1
  Bottom Layer w0.2: v1(5.385,12.822) 5.141,13.066 5.141,21.747 5.055,21.833 5.055,27.443 5.147,27.535 5.147,34.962 6.045,35.86 13.945,35.86 14.173,36.089 14.173,36.348 15.215,36.348 16.332,35.231 16.332,34.362 16.459,34.235 16.459,33.498 16.385,33.498 U1.87 v1(16.385,32.043)
LED3: LD4.1 U1.36 | length 28.6
  Top Layer w0.2: LD4.1 4.623,8.407 4.623,12.865 3.946,13.542 3.946,15.32 10.643,22.017 16.561,22.017 17.885,20.693 v1(17.885,17.997)
  Bottom Layer w0.2: U1.36 v1(17.885,17.997)
NetLD1_2: LD1.2 R1.1 | length 1.1
  Top Layer w0.2: R1.1 LD1.2
NetLD2_2: LD2.2 R2.1 | length 3.6
  Top Layer w0.2: R2.1 v1(8.778,5.994) ; LD2.2 9.073,7.061 9.462,6.672 v1(9.462,6.193)
  Bottom Layer w0.2: v1(8.778,5.994) 8.977,6.193 v1(9.462,6.193)
NetLD3_2: LD3.2 R3.1 | length 1.1
  Top Layer w0.2: R3.1 LD3.2
NetLD4_2: LD4.2 R4.1 | length 2.5
  Top Layer w0.2: R4.1 v1(3.414,5.994) 3.414,6.803 3.672,7.061 LD4.2
NetR26_2: R26.2 R27.2 U2.1 | length 5.6
  Bottom Layer w0.2: v1@2.642,8.306 v1(2.652,8.306) R27.2 R26.2 5.198,8.306 v1(6.375,9.483) U2.1
TDI: JP1.9 U1.23 | length 40.2
  Bottom Layer w0.2: JP1.9 15.223,41.423 20.152,41.423 20.549,41.026 20.549,37.359 21.383,36.525 28.52,36.525 30.573,34.472 30.573,24.153 30.081,23.661 30.081,22.431 27.67,20.02 v1(25.862,20.02) U1.23
TDO: JP1.3 U1.25 | length 29.6
  Top Layer w0.2: JP1.3 23.021,41.601 24.943,41.601 25.806,40.737 25.806,31.822 25.298,31.314 25.298,23.465 27.229,21.535 27.229,19.57 v1(26.679,19.02)
  Bottom Layer w0.2: U1.25 v1(26.679,19.02)
TMS: JP1.5 U1.22 | length 30.1
  Top Layer w0.2: JP1.5 20.777,38.943 20.777,36.444 21.565,35.657 23.851,35.657 24.232,35.276 24.232,32.888 24.46,32.66 24.46,27.961 23.495,27.961 23.368,28.088 v1(21.082,28.088)
  Bottom Layer w0.2: v1(21.082,28.088) 21.082,21.688 22.25,20.52 v1(23.908,20.52) U1.22
pads on no net: B1.0 JP1.6 JP1.7 JP1.8 U1.14 U1.16 U1.18 U1.58 U2.4

## Polygon pours and split planes (outlines as drawn)
3.3V on 3.3V_PLANE (split plane): 32.51,0.51 0.51,0.51 0.51,42.67 32.51,42.67
GND on GND_PLANE (split plane): 32.51,0.51 0.51,0.51 0.51,42.67 32.51,42.67

## Silkscreen, mask and mechanical layers (free items; w line width, h text height)
Bottom Overlay:
  region: 26.35,31.586 26.35,30.414 25.705,31.009
  text "n-MAX" at 12.525,38.125 h2.5
Mechanical 3:
  the board outline again, w0.15

## Text inside footprints (layer, text, board x,y; h text height)
B1: Top Overlay "n-MAX" at 12.573,27.559 h3.4